# Altium PCB class-sensor.PcbDoc (part 1 of 2)
Units mm, origin at the board's own origin, x right, y up, seen from the top; angles counter-clockwise.
Board outline 152.4 x 135.3 mm, 2 copper layers (Top Layer, Bottom Layer); 48 components, 76 nets, 317 pads, 56 vias.
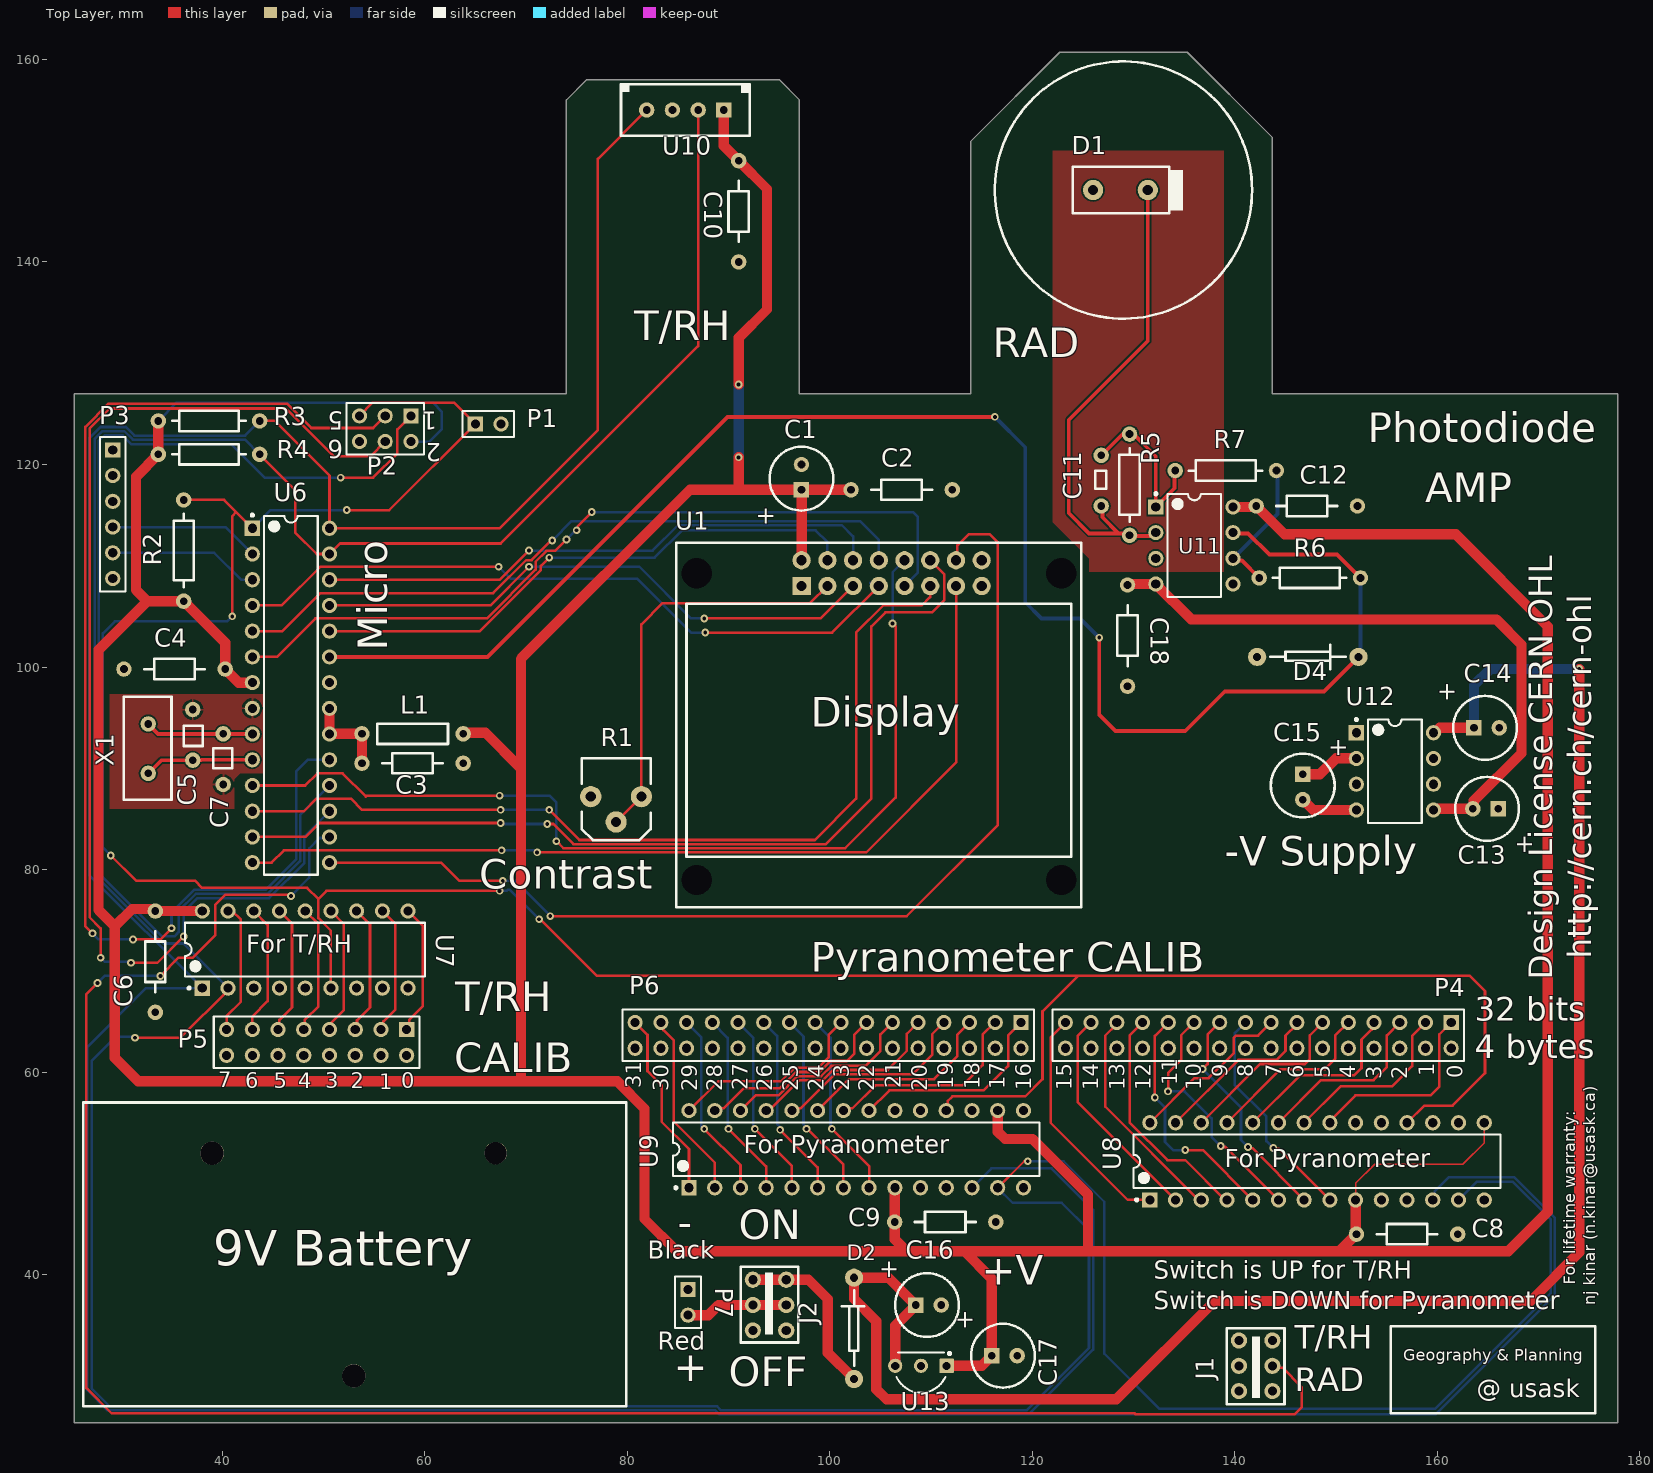
[diagram p0: Top Layer view]
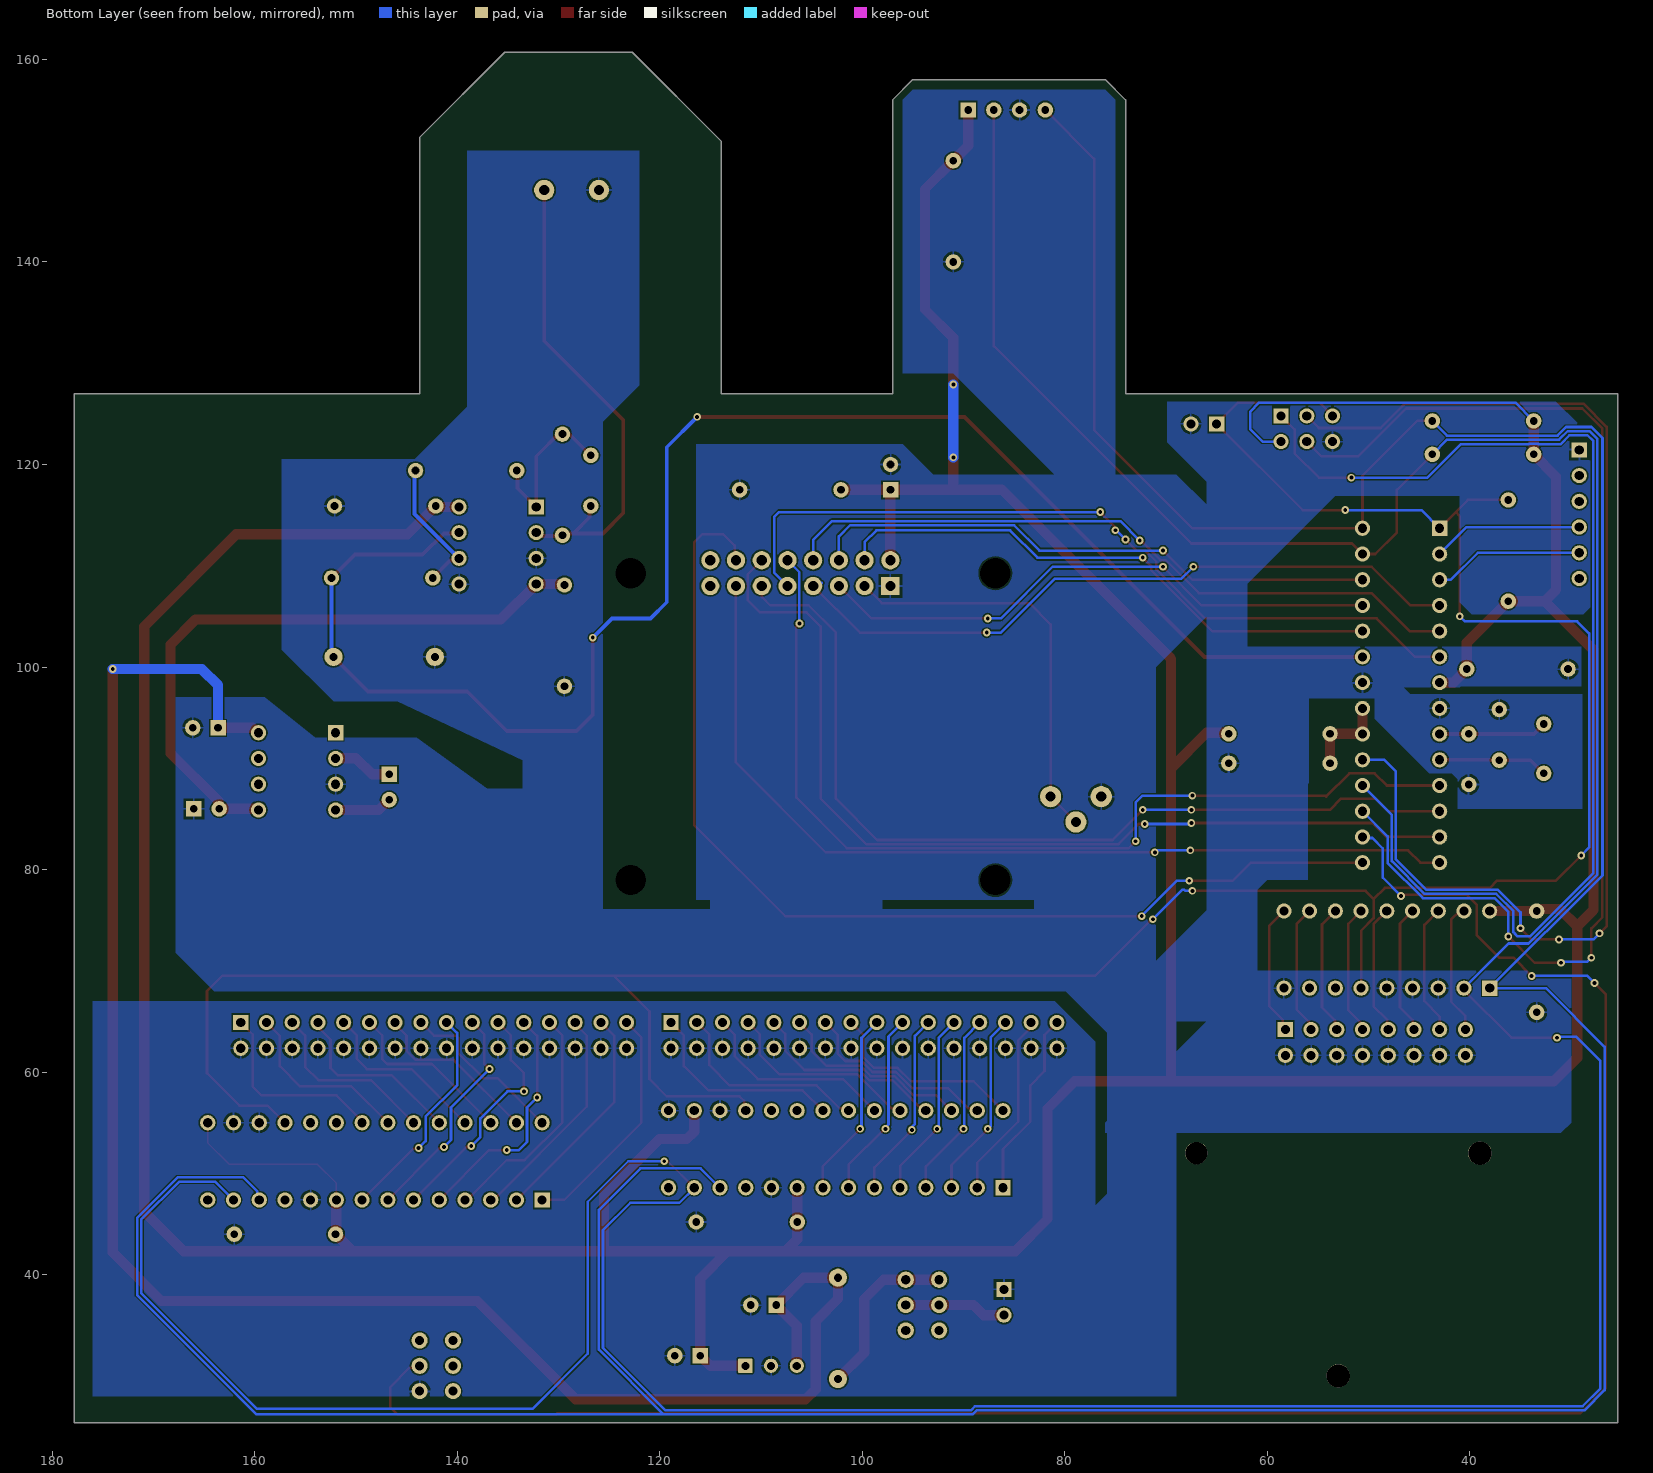
[diagram p1: Bottom Layer view, seen from below]

## Layer stack, top to bottom
Top Solder: solder mask 0.0102, Solder Resist, Dk 3.5
Top Layer: signal copper 0.0356
Dielectric 1: dielectric 0.32, FR-4, Dk 4.8
Bottom Layer: signal copper 0.0356
Bottom Solder: solder mask 0.0102, Solder Resist, Dk 3.5

## Board outline
135.3,160.7 143.7,152.3 143.7,127 177.8,127 177.8,25.4 25.4,25.4 25.4,127 74,127 74,155 74,156 76,158 95,158 97,156 97,127 113.9,127 113.9,151.9 122.7,160.7

## Design rules (kind name [scope] priority, off if disabled: settings)
Clearance "Clearance~Sunstone Circuits" [All] p1: gap=0.152 ignorepadtopadclearanceinfootprint=FALSE except(0: Arc-Hole Track-Hole SMDPad-Hole THPad-Hole Via-Hole Fill-Hole Poly-Hole Region-Hole Text-Hole) // Sunstone Circuits Minimum Clearance Rule (MLB~4&6 Layer Designs)
DiffPairsRouting DiffPairsRouting_1 [(InDifferentialPairClass('All Differential Pairs'))] p1: maxlimit=0.152 minlimit=0.152 mostfreqgap=0.152 toplayer_minwidth=0.381 toplayer_maxwidth=0.381 toplayer_prefwidth=0.381 bottomlayer_minwidth=0.381 bottomlayer_maxwidth=0.381 bottomlayer_prefwidth=0.381 maxuncoupledlength=12.7
DiffPairsRouting [All] p2 off: maxlimit=0.254 minlimit=0.254 mostfreqgap=0.254 toplayer_minwidth=0.381 toplayer_maxwidth=0.381 toplayer_prefwidth=0.381 bottomlayer_minwidth=0.381 bottomlayer_maxwidth=0.381 bottomlayer_prefwidth=0.381 maxuncoupledlength=12.7
HoleSize "HoleSize~Sunstone Circuits" [All] p1: absolutevalues=TRUE maxlimit=6.375 minlimit=0.203 maxpercent=80.000 minpercent=20.000 // Sunstone Circuits Hole Size Rule (MLB~4&6 Layer Designs)
HoleSize Testpoint [All] p2: absolutevalues=TRUE maxlimit=2.54 minlimit=0.025 maxpercent=80.000 minpercent=20.000
HoleSize TestPointUsage [All] p3: absolutevalues=TRUE maxlimit=2.54 minlimit=0.025 maxpercent=80.000 minpercent=20.000
MinimumAnnularRing "MinimumAnnularRing~Sunstone Circuits" [All] p1: minimumring=0.178 // Sunstone Circuits Minimum Annular Ring (MLB~4&6 Layer Designs)
MinimumSolderMaskSliver [All] p1: minsoldermaskwidth=0.127
PlaneClearance "PlaneClearance~Sunstone Circuits" [All] p1: clearance=0.305 // Sunstone Circuits Power Plane Clearance Rule (MLB~4&6 Layer Designs)
PlaneConnect "PlaneConnect~Sunstone Circuits" [All] p1: planeconnectstyle=Relief reliefexpansion=0.254 reliefentries=4 reliefconductorwidth=0.203 reliefairgap=0.254 // Sunstone Circuits Power Plane Connect Rule (MLB~4&6 Layer Designs)
PolygonConnect "PolygonConnect~Sunstone Circuits" [All] p1: connectstyle=Relief reliefconductorwidth=0.203 reliefentries=4 polygonreliefangle="90 Angle" airgapwidth=0.254 // Sunstone Circuits Polygon Connect Style (MLB~4&6 Layer Designs)
RoutingVias "RoutingVias~Sunstone Circuits" [All] p1: holewidth=0.381 width=0.762 viastyle="Through Hole" minholewidth=0.203 minwidth=0.61 maxholewidth=0.508 maxwidth=1.016 // Sunstone Circuits Routing Vias Rule (MLB~4&6 Layer Designs)
ShortCircuit "ShortCircuit~Sunstone Circuits" [All] p1: allowed=FALSE // Sunstone Circuits Short Circuit Rule~Do Not Allow (MLB~4&6 Layer Designs)
SilkToSilkClearance [All] p1: silktosilkclearance=0
SilkToSolderMaskClearance [IsPad] p1: minsilkscreentomaskgap=0 clearancetoexposedcopper=TRUE
SolderMaskExpansion "SolderMaskExpansion~Sunstone Circuits" [All] p1: expansion=0.076 istentingtop=FALSE // Sunstone Circuits Solder Mask Expansion Rule (MLB~4&6 Layer Designs)
ViasUnderSMD "ViasUnderSMD~Sunstone Circuits" [All] p1: allowed=FALSE // Sunstone Circuits Vias Under SMD~Do Not Allow (MLB~4&6 Layer Designs)
Width "Width~Sunstone Circuits" [All] p1: maxlimit=2.54 minlimit=0.152 preferedwidth=0.254 // Sunstone Circuits Minimum Width Rule (MLB~4&6 Layer Designs)
22 further rules are at their usual default settings.

## Components (designator, comment, footprint, x,y, rotation, side; value= is the part's Value field where it differs from the comment)
C1 "Cap Pol1" ECE-A1HKS100 97.2,117.5 r180 top value=10uF
C2 "Cap Semi" A104K15X7RF5TAA 112.1,117.5 r180 top value=0.1uF
C3 "Cap Semi" A104K15X7RF5TAA 63.8,90.5 r180 top value=0.1uF
C4 "Cap Semi" A104K15X7RF5TAA 30.3,99.8 r0 top value=0.1uF
C5 "Cap Semi" K330J15C0GF5TH5 37.1,95.8 r270 top value=33pF
C6 "Cap Semi" A104K15X7RF5TAA 33.4,65.9 r90 top value=0.1uF
C7 "Cap Semi" K330J15C0GF5TH5 40.1,88.4 r90 top value=33pF
C8 "Cap Semi" A104K15X7RF5TAA 162,44 r180 top value=0.1uF
C9 "Cap Semi" A104K15X7RF5TAA 116.4,45.2 r180 top value=0.1uF
C10 "Cap Semi" A104K15X7RF5TAA 91,140 r90 top value=0.1uF
C11 "Cap Semi" FA28C0G1H010CNU06 126.8,115.9 r90 top value=1pF
C12 "Cap Semi" A104K15X7RF5TAA 152.1,115.9 r180 top value=0.1uF
C13 "Cap Pol1" ECE-A1HKS100 166,86 r270 top value=10uF
C14 "Cap Pol1" ECE-A1HKS100 163.6,94 r90 top value=10uF
C15 "Cap Pol1" ECE-A1HKS100 146.7,89.4 r0 top value=10uF
C16 "Cap Pol1" ECE-A1HKS100 108.5,37 r90 top value=10uF
C17 "Cap Pol1" ECE-A1HKS100 116,32 r90 top value=10uF
C18 "Cap Semi" A104K15X7RF5TAA 129.4,98.1 r90 top value=0.1uF
D1 "BPW34" BPW34 126,147.1 r0 top
D2 "D Schottky" BAT85S-TAP 102.3,34.7 r90 top
D4 "D Schottky" BAT85S-TAP 147.2,101.1 r0 top
J1 "SWITCH SLIDE DPDT 300MA 6V" JS202011CQN 142.1,31 r270 top
J2 "SWITCH SLIDE DPDT 300MA 6V" JS202011CQN 94,37 r90 top
L1 "Inductor" 78F100J-TR-RC 63.8,93.4 r180 top value=10uH
P1 "Header 2" HDR1X2 65,124 r0 top
P2 "Header 3X2" HDR2X3 58.64,124.8 r180 top
P3 "Header 6" HDR1X6 29.2,121.44 r270 top
P4 "Header 16X2" HDR2X16 161.36,64.9 r180 top
P5 "Header 8X2" HDR2X8 58.22,64.2 r180 top
P6 "Header 16X2" HDR2X16 118.88,64.9 r180 top
P7 "Header 2" HDR1X2 86,38.54 r270 top
R1 "3306P-1-502" 3306P-1-502 78.9,84.7 r180 top
R2 "Res3" CF14JT10K0 36.2,116.5 r270 top value=10k
R3 "Res3" CF14JT10K0 43.7,124.3 r180 top value=10k
R4 "Res3" CF14JT10K0 43.7,121 r180 top value=10k
R5 "Res3" MFP-25BRD52-910R 129.6,117.9 r90 top value=910
R6 "Res3" RNF14FTD1K00 147.3,108.8 r0 top value=1k
R7 "Res3" RNF14FTD1K00 139,119.4 r0 top value=1k
U1 "ERM802-1 LCD Module 8x2" ERM802-1 86.85,109.265 r0 top
U6 "ATmega168A-PU" 28P3 46.79,97.19 r0 top
U7 "MCP23008-E/P" PDIP300-P18 48.2,72.1 r90 top
U8 "MCP23017-E/SP" SPDIP300-SP28 148.11,51.19 r90 top
U9 "MCP23017-E/SP" SPDIP300-SP28 102.61,52.39 r90 top
U10 "AM2320" AM2320 89.54,155 r180 top
U11 "TL072IP" P0008A 136,112 r0 top
U12 "LMC7660IN/NOPB" P0008A 155.8,89.7 r0 top
U13 "LP2950-50LPRE3" LP0003A 109,31 r270 top
X1 "ATS080B-E" ATS080B-E 32.7,94.38 r270 top

## Footprints (in the part's own frame and the unit in brackets; to place one, negate y for a bottom-side part, rotate by r counter-clockwise, add the part's x,y. Pads: shape width x height; smd on the part's side, far side on the other; paste and mask are expansions set on the pad)
28P3 [mm] "28-Pin Plastic Dual In-Line Package (PDIP)"
  rect 1.5x1.5 hole 0.9: 1(-3.81,16.51)
  round 1.5 hole 0.9: 2(-3.81,13.97) 3(-3.81,11.43) 4(-3.81,8.89) 5(-3.81,6.35) 6(-3.81,3.81) 7(-3.81,1.27) 8(-3.81,-1.27) 9(-3.81,-3.81) 10(-3.81,-6.35) 11(-3.81,-8.89) 12(-3.81,-11.43) 13(-3.81,-13.97) 14(-3.81,-16.51) 15(3.81,-16.51) 16(3.81,-13.97) 17(3.81,-11.43) 18(3.81,-8.89) 19(3.81,-6.35) 20(3.81,-3.81) 21(3.81,-1.27) 22(3.81,1.27) 23(3.81,3.81) 24(3.81,6.35) 25(3.81,8.89) 26(3.81,11.43) 27(3.81,13.97) 28(3.81,16.51)
  silkscreen extent -3.93,-17.7 2.65,17.93, body extent -3.6,-17.65 3.6,17.65, height 4.58
78F100J-TR-RC [mil] "FIXED IND 10UH 370MA 750 MOHM TH"
  round 60 hole 30: 1(0,0) 2(393.7,0)
  silkscreen extent 59,-39 335,39
3306P-1-502 [mm] "TRIMMER 5K OHM 0.2W PC PIN TOP"
  round 2.1 hole 1: 1(-2.5,-2.5) 2(0,0) 3(2.5,-2.5)
  silkscreen extent -3.4,-6.3 3.4,1.8, body extent -3.4,-6.33 3.4,1.8, height 7.71
A104K15X7RF5TAA [mil] "CAP CER 0.1UF 50V X7R AXIAL"
  round 60 hole 30: 1(0,0) 2(393.7,0)
  silkscreen extent 79,-39 315,39
AM2320 [mil] "AM2320 DIGITAL TEMPERATURE AND RH"
  rect 60x60 hole 30: 1(0,0)
  round 60 hole 30: 2(100,0) 3(200,0) 4(300,0)
  silkscreen extent -102,-102 402,100
ATS080B-E [mil] "CRYSTAL 8.0000MHZ 18PF T/H"
  round 60 hole 30: 1(0,0) 2(192.13,0)
  silkscreen extent -106,-94 295,91
BAT85S-TAP [mm] "DIODE SCHOTTKY 30V 200MA DO35"
  round 1.8 hole 0.8: 1(-5,-0.1) 2(5,-0.1)
  silkscreen extent -3.7,-0.5 3.75,0.4
BPW34 [mm] "BPW34"
  round 2 hole 1: 1(0,0) 2(5.4,0)
  silkscreen extent -2,-2.3 8.9,2.3
CF14JT10K0 [mil] "RES 10K OHM 1/4W 5% AXIAL"
  round 60 hole 30: 1(0,0) 2(393.7,0)
  silkscreen extent 53,-39 339,39
ECE-A1HKS100 [mil] "CAP ALUM 10UF 20% 50V RADIAL"
  rect 60x60 hole 30: 1(0,0)
  round 60 hole 30: 2(0,-98.43)
  silkscreen extent -124,-167 124,81, body extent -126,-167 122,81, height 197
ERM802-1 [mm]
  rect 1.8x1.8 hole 1: 1(10.37,-1.265)
  round 1.8 hole 1: 2(10.37,1.275) 3(12.91,-1.265) 4(12.91,1.275) 5(15.45,-1.265) 6(15.45,1.275) 7(17.99,-1.265) 8(17.99,1.275) 9(20.53,-1.265) 10(20.53,1.275) 11(23.07,-1.265) 12(23.07,1.275) 13(25.61,-1.265) 14(25.61,1.275) 15(28.15,-1.265) 16(28.15,1.275)
  round 2.2 hole 3: H1(0,0) H2(36,0) H3(0,-30.3) H4(36,-30.3)
  silkscreen extent -2,-33 38,3
FA28C0G1H010CNU06 [mil] "CAP CER 1PF 50V C0G RADIAL"
  round 60 hole 30: 1(0,0) 2(196.85,0)
  silkscreen extent 67,-20 138,24
HDR1X2 [mm] "Connector; Header; 2 Position"
  rect 1.5x1.5 hole 0.9: 1(0,0)
  round 1.5 hole 0.9: 2(2.54,0)
  silkscreen extent -1.27,-1.27 3.81,1.27
HDR1X6 [mm] "Connector; Header; 6 Position"
  rect 1.5x1.5 hole 0.9: 1(0,0)
  round 1.5 hole 0.9: 2(2.54,0) 3(5.08,0) 4(7.62,0) 5(10.16,0) 6(12.7,0)
  silkscreen extent -1.27,-1.27 13.97,1.27
HDR2X3 [mm] "Connector; Header; 3x2 Position"
  rect 1.5x1.5 hole 0.9: 1(0,0)
  round 1.5 hole 0.9: 2(0,2.54) 3(2.54,0) 4(2.54,2.54) 5(5.08,0) 6(5.08,2.54)
  silkscreen extent -1.27,-1.27 6.35,3.81
HDR2X8 [mm] "Connector; Header; 8x2 Position"
  rect 1.5x1.5 hole 0.9: 1(0,0)
  round 1.5 hole 0.9: 2(0,2.54) 3(2.54,0) 4(2.54,2.54) 5(5.08,0) 6(5.08,2.54) 7(7.62,0) 8(7.62,2.54) 9(10.16,0) 10(10.16,2.54) 11(12.7,0) 12(12.7,2.54) 13(15.24,0) 14(15.24,2.54) 15(17.78,0) 16(17.78,2.54)
  silkscreen extent -1.27,-1.27 19.05,3.81
HDR2X16 [mm] "Connector; Header; 16x2 Position"
  rect 1.5x1.5 hole 0.9: 1(0,0)
  round 1.5 hole 0.9: 2(0,2.54) 3(2.54,0) 4(2.54,2.54) 5(5.08,0) 6(5.08,2.54) 7(7.62,0) 8(7.62,2.54) 9(10.16,0) 10(10.16,2.54) 11(12.7,0) 12(12.7,2.54) 13(15.24,0) 14(15.24,2.54) 15(17.78,0) 16(17.78,2.54) 17(20.32,0) 18(20.32,2.54) 19(22.86,0) 20(22.86,2.54) 21(25.4,0) 22(25.4,2.54) 23(27.94,0) 24(27.94,2.54) 25(30.48,0) 26(30.48,2.54) 27(33.02,0) 28(33.02,2.54) 29(35.56,0) 30(35.56,2.54) 31(38.1,0) 32(38.1,2.54)
  silkscreen extent -1.27,-1.27 39.37,3.81
JS202011CQN [mm] "SWITCH SLIDE DPDT 300MA 6V"
  round 1.6 hole 0.9: 1(-2.5,-1.7) 2(0,-1.7) 3(2.5,-1.7) 4(-2.5,1.6) 5(0,1.6) 6(2.5,1.6)
  silkscreen extent -3.7,-2.9 3.8,2.8
K330J15C0GF5TH5 [mil] "CAP CER 33PF 50V C0G/NP0 RADIAL"
  round 60 hole 30: 1(0,0) 2(196.85,0)
  silkscreen extent 63,-35 142,39
LP0003A [mm] "TO, Flat Index; 3 In-Line, Formed Axial Leads; Body Dia. 4.8mm; Leads 0.56 x 0.41 mm (max)"
  rrect7% 1.4x1.4 hole 0.8: 1(0,2.54)
  round 1.4 hole 0.8: 2(0,0) 3(0,-2.54)
  silkscreen extent -1.35,-2.41 2.65,2.95, body extent -1.33,-2.83 2.35,2.83, height 9.01
MFP-25BRD52-910R [mil] "RES 910 OHM 1/4W 0.1% AXIAL"
  round 60 hole 30: 1(-192.91,0) 2(200.79,0)
  silkscreen extent -140,-39 146,39
P0008A [mm] "DIP, 8-Leads, Body 10.15x6.6mm, Pitch 2.54mm"
  rect 1.5x1.5 hole 0.9: 1(-3.81,3.81)
  round 1.5 hole 0.9: 2(-3.81,1.27) 3(-3.81,-1.27) 4(-3.81,-3.81) 5(3.81,-3.81) 6(3.81,-1.27) 7(3.81,1.27) 8(3.81,3.81)
  silkscreen extent -3.93,-5.1 2.65,5.23, body extent -3.95,-5.07 3.95,5.07, height 5.08
PDIP300-P18 [mm] "DIP, 18-Pin, Row Spacing 7.62 mm, Pitch 2.54 mm"
  rect 1.5x1.5 hole 0.9: 1(-3.81,10.16)
  round 1.5 hole 0.9: 2(-3.81,7.62) 3(-3.81,5.08) 4(-3.81,2.54) 5(-3.81,0) 6(-3.81,-2.54) 7(-3.81,-5.08) 8(-3.81,-7.62) 9(-3.81,-10.16) 10(3.81,-10.16) 11(3.81,-7.62) 12(3.81,-5.08) 13(3.81,-2.54) 14(3.81,0) 15(3.81,2.54) 16(3.81,5.08) 17(3.81,7.62) 18(3.81,10.16)
  silkscreen extent -3.93,-11.85 2.65,11.85, body extent -3.6,-11.8 3.6,11.8, height 5.33
RNF14FTD1K00 [mil] "RES 1K OHM 1/4W 1% AXIAL"
  round 60 hole 30: 1(-192.91,0) 2(200.79,0)
  silkscreen extent -140,-39 146,39
SPDIP300-SP28 [mm] "DIP, 28-Pin, Row Spacing 7.62 mm, Pitch 2.54 mm"
  rect 1.5x1.5 hole 0.9: 1(-3.81,16.51)
  round 1.5 hole 0.9: 2(-3.81,13.97) 3(-3.81,11.43) 4(-3.81,8.89) 5(-3.81,6.35) 6(-3.81,3.81) 7(-3.81,1.27) 8(-3.81,-1.27) 9(-3.81,-3.81) 10(-3.81,-6.35) 11(-3.81,-8.89) 12(-3.81,-11.43) 13(-3.81,-13.97) 14(-3.81,-16.51) 15(3.81,-16.51) 16(3.81,-13.97) 17(3.81,-11.43) 18(3.81,-8.89) 19(3.81,-6.35) 20(3.81,-3.81) 21(3.81,-1.27) 22(3.81,1.27) 23(3.81,3.81) 24(3.81,6.35) 25(3.81,8.89) 26(3.81,11.43) 27(3.81,13.97) 28(3.81,16.51)
  silkscreen extent -3.93,-18.1 2.65,18.1, body extent -3.55,-18.1 3.55,18.1, height 5.33

## Part data
C1 C13 C14 C15 C16 C17: "Polarized Capacitor (Radial)", Capacitance=10uF, Case/Package=Radial, Leakage Current=3A, Manufacturer=Panasonic, Manufacturer Part Number=ECE-A1HKS100, Max Operating Temperature=85°C, Min Operating Temperature=-40°C, Package Quantity=200, Ripple Current=35mA, Supplier Part Number 1=P997-ND, Tolerance=20%, Voltage=50V, ComponentLink1Description=https://datasheet.ciiva.com/11778/0900766b800274c4-11778985.pdf?src-supplier=RSComponents, ComponentLink1URL=https://datasheet.ciiva.com/11778/0900766b800274c4-11778985.pdf?src-supplier=RSComponents, ComponentLink2Description=https://datasheet.ciiva.com/17536/aba0000ce15-17536597.pdf?src-supplier=Avnet+Europe, ComponentLink2URL=https://datasheet.ciiva.com/17536/aba0000ce15-17536597.pdf?src-supplier=Avnet+Europe, ComponentLink3Description=https://datasheet.ciiva.com/14594/70067878-14594328.pdf?src-supplier=Allied+Electronics, ComponentLink3URL=https://datasheet.ciiva.com/14594/70067878-14594328.pdf?src-supplier=Allied+Electronics, ComponentLink4Description=https://datasheet.ciiva.com/16205/aba0000ce15-16205737.pdf?src-supplier=Future+Electronics, ComponentLink4URL=https://datasheet.ciiva.com/16205/aba0000ce15-16205737.pdf?src-supplier=Future+Electronics, ComponentLink5Description=https://datasheet.ciiva.com/24025/a-e-461514-24025641.pdf?src-supplier=Mouser, ComponentLink5URL=https://datasheet.ciiva.com/24025/a-e-461514-24025641.pdf?src-supplier=Mouser, ComponentLink6Description=https://datasheet.ciiva.com/43459/1339471-43459545.pdf?src-supplier=Farnell, ComponentLink6URL=https://datasheet.ciiva.com/43459/1339471-43459545.pdf?src-supplier=Farnell, ComponentLink7Description=https://datasheet.ciiva.com/15166/getdatasheetpartid-169217-15166123.pdf?src-supplier=Verical, ComponentLink7URL=https://datasheet.ciiva.com/15166/getdatasheetpartid-169217-15166123.pdf?src-supplier=Verical, ComponentLink8Description=https://datasheet.ciiva.com/46397/1339471-46397117.pdf?src-supplier=Element14, ComponentLink8URL=https://datasheet.ciiva.com/46397/1339471-46397117.pdf?src-supplier=Element14, ComponentLink9Description=https://datasheet.ciiva.com/2983/aba0000ce15-2983886.pdf?src-supplier=Avnet, ComponentLink9URL=https://datasheet.ciiva.com/2983/aba0000ce15-2983886.pdf?src-supplier=Avnet, Diameter=6.3mm, Height=5mm, Height - Seated (Max)=0.197inch, LatestRevisionDate=17-Jul-2002, LatestRevisionNote="Re-released for DXP Platform.", Lead Diameter=0.45mm, Lead Free="Lead Free", Lead Pitch=2.5mm, Length=5mm, Life (Hours)=1000Hour, Mount="Through Hole,PCB", Number of Pins=2, PackageDescription="Polarized Capacitor (Radial); 2 Leads", PackageReference=RB7.6-15, Packaging=Bulk, Polarity=Polar, Pricing 1="1=0.10000, 10=0.03000 (USD)", Published=8-Jun-2000, Publisher="Altium Limited", Radiation Hardening=No, REACH SVHC="No SVHC", Ripple Current (AC)=35mA, RoHS=Yes, Stock 1=132836, Supplier 1=Digi-Key, Termination=Radial, Voltage Rating=50V, Voltage Rating (DC)=50V, Weight=0.01lb, Width=0.5inch
C2 C3 C4 C6 C8 C9 C10 C12 C18: "Capacitor (Semiconductor SIM Model)", Capacitance=100nF, Case/Package=Dipped, Dielectric=X7R, Manufacturer="Vishay BCcomponents", Manufacturer Part Number=A104K15X7RF5TAA, Max Operating Temperature=125°C, Min Operating Temperature=-55°C, Package Quantity=1, Supplier Part Number 1=1109PHCT-ND, Tolerance=10%, Voltage=50V, ComponentLink1Description=https://datasheet.ciiva.com/145/aseries-145936.pdf?src-supplier=Digi-Key, ComponentLink1URL=https://datasheet.ciiva.com/145/aseries-145936.pdf?src-supplier=Digi-Key, ComponentLink2Description=https://datasheet.ciiva.com/5815/1734588-5815375.pdf?src-supplier=Farnell, ComponentLink2URL=https://datasheet.ciiva.com/5815/1734588-5815375.pdf?src-supplier=Farnell, ComponentLink3Description=https://datasheet.ciiva.com/18442/70122957-18442089.pdf?src-supplier=Allied+Electronics, ComponentLink3URL=https://datasheet.ciiva.com/18442/70122957-18442089.pdf?src-supplier=Allied+Electronics, ComponentLink4Description=https://datasheet.ciiva.com/2988/aseries-2988250.pdf?src-supplier=Avnet, ComponentLink4URL=https://datasheet.ciiva.com/2988/aseries-2988250.pdf?src-supplier=Avnet, ComponentLink5Description=https://datasheet.ciiva.com/17444/aseries-17444908.pdf?src-supplier=Avnet+Europe, ComponentLink5URL=https://datasheet.ciiva.com/17444/aseries-17444908.pdf?src-supplier=Avnet+Europe, ComponentLink6Description=https://datasheet.ciiva.com/46418/1796772-46418252.pdf?src-supplier=Element14, ComponentLink6URL=https://datasheet.ciiva.com/46418/1796772-46418252.pdf?src-supplier=Element14, ComponentLink7Description=https://datasheet.ciiva.com/145/aseries-145935.pdf?src-supplier=Digi-Key, ComponentLink7URL=https://datasheet.ciiva.com/145/aseries-145935.pdf?src-supplier=Digi-Key, Contact Plating=Tin, Diameter=2.5mm, LatestRevisionDate=29-May-2009, LatestRevisionNote="IPC-7351 Footprint Added.", Lead Diameter=0.5mm, Lead Free="Lead Free", Lead Length=24.3mm, Length=3.8mm, Mount="Through Hole,PCB,Axial", PackageDescription="Chip Capacitor", PackageReference=C1206, Packaging="Tape and Reel", Pricing 1="1=0.24000, 10=0.16500, 100=0.09350, 500=0.06598, 1000=0.05773, 2500=0.05498 (USD)", Published=8-Jun-2000, Publisher="Altium Limited", Radiation Hardening=No, REACH SVHC=Unknown, RoHS=Yes, Stock 1=502711, Supplier 1=Digi-Key, Termination=Axial, Voltage Rating=50V, Voltage Rating (DC)=50V
C5 C7: "Capacitor (Semiconductor SIM Model)", Capacitance=33pF, Case/Package=Dipped, Dielectric=C0G, Dielectric Material=Ceramic, Manufacturer="Vishay BCcomponents", Manufacturer Part Number=K330J15C0GF5TH5, Max Operating Temperature=125°C, Min Operating Temperature=-55°C, Package Quantity=1, Supplier Part Number 1=BC1036CT-ND, Tolerance=5%, Voltage Rating=50V, ComponentLink1Description=https://datasheet.ciiva.com/145/kseries-145772.pdf?src-supplier=Digi-Key, ComponentLink1URL=https://datasheet.ciiva.com/145/kseries-145772.pdf?src-supplier=Digi-Key, ComponentLink2Description=https://datasheet.ciiva.com/145/kseries-145773.pdf?src-supplier=Digi-Key, ComponentLink2URL=https://datasheet.ciiva.com/145/kseries-145773.pdf?src-supplier=Digi-Key, Depth=2.5mm, Height - Seated (Max)=0.257inch, LatestRevisionDate=29-May-2009, LatestRevisionNote="IPC-7351 Footprint Added.", Lead/Base Style="Formed Leads", Lead Free="Contains Lead", Lead Length=30mm, Lead Pitch=5mm, Length=0.157inch, Mount="Through Hole", Number of Pins=2, PackageDescription="Chip Capacitor", PackageReference=C1206, Packaging="Tape and Reel", Pricing 1="1=0.26000, 10=0.17400, 100=0.08830, 500=0.06040, 1000=0.05343 (USD)", Published=8-Jun-2000, Publisher="Altium Limited", Radiation Hardening=No, REACH SVHC=Unknown, RoHS=Yes, Stock 1=19591, Supplier 1=Digi-Key, Termination=Radial, Voltage Rating (DC)=50V, Width=0.098inch
C11: "Capacitor (Semiconductor SIM Model)", Capacitance=1pF, Case/Package=Radial, Manufacturer=TDK, Manufacturer Part Number=FA28C0G1H010CNU06, Max Operating Temperature=125°C, Min Operating Temperature=-55°C, Ratings=AEC-Q200, Supplier Part Number 1=445-180705-1-ND, Voltage Rating=50V, ComponentLink1Description=https://product.tdk.com/info/en/catalog/datasheets/leadmlcc_halogenfree_fa_en.pdf?src-supplier=Digi-Key, ComponentLink1URL=https://product.tdk.com/info/en/catalog/datasheets/leadmlcc_halogenfree_fa_en.pdf?src-supplier=Digi-Key, Height - Seated (Max)=0.217inch, LatestRevisionDate=29-May-2009, LatestRevisionNote="IPC-7351 Footprint Added.", Lead/Base Style=Kinked, Lead Pitch=0.197inch, Length=0.157inch, Mount="Through Hole", PackageDescription="Chip Capacitor", PackageReference=C1206, Packaging="Tape and Reel", Pricing 1="1=0.32000, 10=0.22100, 100=0.12520, 500=0.08840, 1000=0.07735 (USD)", Published=8-Jun-2000, Publisher="Altium Limited", Stock 1=7819, Supplier 1=Digi-Key, Width=0.098inch
D1: Dark Current=30nA, Forward Voltage=1.3V, Manufacturer="Osram Opto", Max Operating Temperature=100°C, Min Operating Temperature=-40°C, Power Dissipation=150mW, Reverse Breakdown Voltage=32V, Supplier Part Number 1=475-1070-ND, ComponentLink1Description=https://datasheet.ciiva.com/19453/1621132-19453495.pdf?src-supplier=Jameco, ComponentLink1URL=https://datasheet.ciiva.com/19453/1621132-19453495.pdf?src-supplier=Jameco, ComponentLink2Description=https://datasheet.ciiva.com/11772/0900766b80a15a67-11772491.pdf?src-supplier=RSComponents, ComponentLink2URL=https://datasheet.ciiva.com/11772/0900766b80a15a67-11772491.pdf?src-supplier=RSComponents, ComponentLink3Description=https://datasheet.ciiva.com/26883/getdatasheetpartid-571168-26883163.pdf?src-supplier=Verical, ComponentLink3URL=https://datasheet.ciiva.com/26883/getdatasheetpartid-571168-26883163.pdf?src-supplier=Verical, ComponentLink4Description=https://datasheet.ciiva.com/29138/153005-da-01-ml-pin-photodiode-bpw34-osr-de-en-29138768.pdf?src-supplier=Conrad, ComponentLink4URL=https://datasheet.ciiva.com/29138/153005-da-01-ml-pin-photodiode-bpw34-osr-de-en-29138768.pdf?src-supplier=Conrad, Fall Time=20ns, Manufacturer Part Number=BPW34, Mount="Through Hole", Number of Pins=2, Packaging=Bulk, Polarity=Reverse, Pricing 1="1=1.05000, 10=0.81700, 100=0.52550, 500=0.44374, 1000=0.35033, 2500=0.32697, 5000=0.31529, 10000=0.31062, 25000=0.30362 (USD)", Radiation Hardening=No, Rise Time=20ns, RoHS=Yes, Stock 1=40998, Supplier 1=Digi-Key, Wavelength=850nm
D2 D4: "Schottky Diode", Average Rectified Current=200mA, Forward Voltage=800mV, Manufacturer=Vishay, Manufacturer Part Number=BAT85S-TAP, Max Forward Surge Current (Ifsm)=5A, Max Operating Temperature=125°C, Max Repetitive Reverse Voltage (Vrrm)=30V, Max Reverse Leakage Current=2uA, Min Operating Temperature=-65°C, Package Quantity=10000, Supplier Part Number 1=BAT85S-TAPCT-ND, Code_JEDEC=DO-214-AA, ComponentLink1Description=https://datasheet.ciiva.com/23785/1749004-23785297.pdf?src-supplier=Newark, ComponentLink1URL=https://datasheet.ciiva.com/23785/1749004-23785297.pdf?src-supplier=Newark, ComponentLink2Description=https://datasheet.ciiva.com/17078/bat85s-tap-17078427.pdf?src-supplier=Allied+Electronics, ComponentLink2URL=https://datasheet.ciiva.com/17078/bat85s-tap-17078427.pdf?src-supplier=Allied+Electronics, ComponentLink3Description=https://datasheet.ciiva.com/15144/getdatasheetpartid-50689-15144221.pdf?src-supplier=Verical, ComponentLink3URL=https://datasheet.ciiva.com/15144/getdatasheetpartid-50689-15144221.pdf?src-supplier=Verical, ComponentLink4Description=https://datasheet.ciiva.com/16418/bat85s-16418454.pdf?src-supplier=Future+Electronics, ComponentLink4URL=https://datasheet.ciiva.com/16418/bat85s-16418454.pdf?src-supplier=Future+Electronics, ComponentLink5Description=https://datasheet.ciiva.com/25931/bat85s-25931304.pdf?src-supplier=Avnet+Europe, ComponentLink5URL=https://datasheet.ciiva.com/25931/bat85s-25931304.pdf?src-supplier=Avnet+Europe, ComponentLink6Description=https://datasheet.ciiva.com/13950/bat85s-13950093.pdf?src-supplier=Digi-Key, ComponentLink6URL=https://datasheet.ciiva.com/13950/bat85s-13950093.pdf?src-supplier=Digi-Key, ComponentLink7Description=https://datasheet.ciiva.com/13950/bat85s-13950090.pdf?src-supplier=Digi-Key, ComponentLink7URL=https://datasheet.ciiva.com/13950/bat85s-13950090.pdf?src-supplier=Digi-Key, ComponentLink8Description=https://datasheet.ciiva.com/8283/bat85s-8283915.pdf?src-supplier=Avnet, ComponentLink8URL=https://datasheet.ciiva.com/8283/bat85s-8283915.pdf?src-supplier=Avnet, Contact Plating=Tin,Silver, Element Configuration=Single, Forward Current=200mA, Height=1.7mm, LatestRevisionDate=17-Jul-2002, LatestRevisionNote="Re-released for DXP Platform.", Lead Free="Lead Free", Length=3.9mm, Max Reverse Voltage (DC)=30V, Max Surge Current=5A, Mount="Through Hole", Number of Pins=2, PackageDescription="DO-214-AA/SMB; 2 C-Bend Leads; Body 5.3 x 3.6 mm, inc. leads (LxW)", PackageReference=SMB, Packaging="Ammo Pack", Peak Non-Repetitive Surge Current=5A, Peak Reverse Current=2uA, Pricing 1="1=0.38000, 10=0.31000, 100=0.16440, 500=0.10816, 1000=0.07354, 2500=0.06633, 5000=0.05768 (USD)", Published=8-Jun-2000, Publisher="Altium Limited", Radiation Hardening=No, Recovery Time=5ns, Reverse Recovery Time=5ns, RoHS=Yes, Stock 1=54447, Supplier 1=Digi-Key, Width=1.7mm
J1 J2: library part JS202011CQN, Contact Current Rating=100mA, Contact Resistance=70mR, Current Rating=300mA, Flammability Rating="UL94 V-0", Manufacturer="ITT C&K", Max Operating Temperature=85°C, Max Voltage Rating (DC)=6V, Min Operating Temperature=-40°C, Package Quantity=1, Supplier Part Number 1=401-2001-ND, Actuator Length=2mm, Actuator Material=Nylon,Polyamide, Actuator Type=Standard, ComponentLink1Description=https://datasheet.ciiva.com/5280/js-15sept15-5280375.pdf?src-supplier=Mouser, ComponentLink1URL=https://datasheet.ciiva.com/5280/js-15sept15-5280375.pdf?src-supplier=Mouser, ComponentLink2Description=https://datasheet.ciiva.com/22630/1707718-22630695.pdf?src-supplier=Element14, ComponentLink2URL=https://datasheet.ciiva.com/22630/1707718-22630695.pdf?src-supplier=Element14, ComponentLink3Description=https://datasheet.ciiva.com/8082/js-9dec14-8082522.pdf?src-supplier=Avnet, ComponentLink3URL=https://datasheet.ciiva.com/8082/js-9dec14-8082522.pdf?src-supplier=Avnet, ComponentLink4Description=https://datasheet.ciiva.com/2889/js-9dec14-2889166.pdf?src-supplier=Digi-Key, ComponentLink4URL=https://datasheet.ciiva.com/2889/js-9dec14-2889166.pdf?src-supplier=Digi-Key, Contact Material="Copper Alloy", Contact Plating=Silver, Depth=3.6mm, Electrical Life=5000Cycles, Housing Material=Nylon, Illumination Type=Non-Illuminated, Lead Free="Lead Free", Length=9mm, Manufacturer Part Number=JS202011CQN, Max Current Rating=300mA, Mount="Through Hole", Orientation=Vertical, Packaging=Bulk, Pricing 1="1=0.43000, 10=0.41600, 25=0.40720, 50=0.36380, 100=0.34650, 250=0.33784, 500=0.28586, 1000=0.27720, 5000=0.24255 (USD)", Radiation Hardening=No, REACH SVHC="No SVHC", RoHS=Yes, Stock 1=30365, Supplier 1=Digi-Key, Switch Function=On-On, Switch Travel=2mm, Termination="PC Pins", Throw Configuration=DPDT, Voltage Rating (DC)=6V
L1: Case/Package=Axial, Current Rating=370mA, DC Resistance (DCR)=750mR, Inductance=10uH, Manufacturer=Bourns, Manufacturer Part Number=78F100J-TR-RC, Max Operating Temperature=105°C, Min Operating Temperature=-55°C, Package Quantity=5000, Self Resonant Frequency=18MHz, Supplier Part Number 1=78F100J-TR-RCCT-ND, Test Frequency=7.9MHz, Tolerance=5%, Code_IEC=1005, Code_JEITA=0402, ComponentLink1Description=https://datasheet.ciiva.com/15161/getdatasheetpartid-486343-15161381.pdf?src-supplier=Verical, ComponentLink1URL=https://datasheet.ciiva.com/15161/getdatasheetpartid-486343-15161381.pdf?src-supplier=Verical, ComponentLink2Description=https://datasheet.ciiva.com/6703/78f-series-6703431.pdf?src-supplier=Digi-Key, ComponentLink2URL=https://datasheet.ciiva.com/6703/78f-series-6703431.pdf?src-supplier=Digi-Key, Composition=Wirewound, Contact Plating=Tin, Core Material=Ferrite, DC Current=370mA, Diameter=2.79mm, LatestRevisionDate=29-May-2009, LatestRevisionNote="IPC-7351 Footprint Added.", Lead/Base Style=Axial, Lead Diameter=0.51mm, Length=7.11mm, Max DC Current=370mA, Military Standard=Not, Mount="Through Hole", PackageDescription="Chip Inductor", PackageReference=0402-A, Packaging="Tape and Reel", Pricing 1="1=0.31000, 10=0.27600, 100=0.18980, 500=0.16216, 1000=0.12420, 2500=0.11730 (USD)", Published=8-Jun-2000, Publisher="Altium Limited", Q Factor=40, Radiation Hardening=No, RoHS=Yes, Shielding=Unshielded, Stock 1=122934, Supplier 1=Digi-Key, Termination=Axial
P1: "Header, 2-Pin", Color=White, Contact Resistance=10mR, Current Rating=4A, Flammability Rating="UL94 V-0", Insulation Resistance=500GR, Manufacturer=Molex, Manufacturer Part Number=22-23-2021, Max Operating Temperature=75°C, Min Operating Temperature=0°C, Package Quantity=3000, Supplier Part Number 1=WM4200-ND, Voltage Rating=250V, Approvals=UL,CSA, ComponentLink1Description=https://datasheet.ciiva.com/19454/232266-19454304.pdf?src-supplier=Jameco, ComponentLink1URL=https://datasheet.ciiva.com/19454/232266-19454304.pdf?src-supplier=Jameco, ComponentLink2Description=https://datasheet.ciiva.com/5150/0022232021-pcb-headers-227096-5150681.pdf?src-supplier=Mouser, ComponentLink2URL=https://datasheet.ciiva.com/5150/0022232021-pcb-headers-227096-5150681.pdf?src-supplier=Mouser, ComponentLink3Description=https://datasheet.ciiva.com/22683/1834442-22683561.pdf?src-supplier=Element14, ComponentLink3URL=https://datasheet.ciiva.com/22683/1834442-22683561.pdf?src-supplier=Element14, ComponentLink4Description=https://datasheet.ciiva.com/11746/0900766b80d8f4d1-11746058.pdf?src-supplier=RSComponents, ComponentLink4URL=https://datasheet.ciiva.com/11746/0900766b80d8f4d1-11746058.pdf?src-supplier=RSComponents, ComponentLink5Description=https://datasheet.ciiva.com/30253/114200022232021-pcb-headers-30253002.pdf?src-supplier=Onlinecomponents.com, ComponentLink5URL=https://datasheet.ciiva.com/30253/114200022232021-pcb-headers-30253002.pdf?src-supplier=Onlinecomponents.com, ComponentLink6Description=https://datasheet.ciiva.com/9468/0022232021-pcb-headers-9468476.pdf?src-supplier=Avnet, ComponentLink6URL=https://datasheet.ciiva.com/9468/0022232021-pcb-headers-9468476.pdf?src-supplier=Avnet, ComponentLink7Description=https://datasheet.ciiva.com/18453/70190606-18453638.pdf?src-supplier=Allied+Electronics, ComponentLink7URL=https://datasheet.ciiva.com/18453/70190606-18453638.pdf?src-supplier=Allied+Electronics, ComponentLink8Description=https://datasheet.ciiva.com/16658/0022232021-pcb-headers-16658167.pdf?src-supplier=Avnet+Europe, ComponentLink8URL=https://datasheet.ciiva.com/16658/0022232021-pcb-headers-16658167.pdf?src-supplier=Avnet+Europe, Contact Material=Brass, Contact Plating=Tin,Copper, Depth=6.35mm, Gender=Male, Glow Wire Compliant=Non-compliant, Halogen Free="Low Halogen", Height=10.67mm, Housing Color=White, Housing Material=Nylon, LatestRevisionDate=17-Jul-2002, LatestRevisionNote="Re-released for DXP Platform.", Lead Free="Lead Free", Length=5.08mm, Max Current Rating=4A, Mount="Through Hole", Number of Circuits=2, Number of Contacts=2, Number of Positions=2, Number of Rows=1, Orientation=Straight, Packaging=Bulk, Pitch=2.54mm, Pricing 1="1=0.17000, 10=0.16100, 100=0.11150, 500=0.09438, 1000=0.07722, 5000=0.06864, 10000=0.06221 (USD)", Publisher="Altium Limited", Radiation Hardening=No, REACH SVHC=Unknown, RoHS=Yes, Stock 1=25623, Supplier 1=Digi-Key, Termination="Through Hole", Voltage Rating (DC)=250V
P2: "Header, 3-Pin, Dual row", Color=Black, Contact Resistance=25mR, Current Rating=3A, Insulation Resistance=10GR, Manufacturer=Harwin, Manufacturer Part Number=M20-9980346, Max Operating Temperature=105°C, Min Operating Temperature=-40°C, Package Quantity=1000, Supplier Part Number 1=952-2121-ND, ComponentLink1Description=https://datasheet.ciiva.com/26899/getdatasheetpartid-483857-26899433.pdf?src-supplier=Verical, ComponentLink1URL=https://datasheet.ciiva.com/26899/getdatasheetpartid-483857-26899433.pdf?src-supplier=Verical, ComponentLink2Description=https://datasheet.ciiva.com/11745/0900766b81034e61-11745752.pdf?src-supplier=RSComponents, ComponentLink2URL=https://datasheet.ciiva.com/11745/0900766b81034e61-11745752.pdf?src-supplier=RSComponents, ComponentLink3Description=https://datasheet.ciiva.com/8046/112195-8046906.pdf?src-supplier=Element14, ComponentLink3URL=https://datasheet.ciiva.com/8046/112195-8046906.pdf?src-supplier=Element14, Connector Type="Male Pin", Contact Material=Bronze,Brass, Contact Mating Length=0.24inch, Contact Plating=Tin, Depth=5.08mm, Gender=Male, Housing Color=Black, Housing Material=Nylon, LatestRevisionDate=17-Jul-2002, LatestRevisionNote="Re-released for DXP Platform.", Length=7.62mm, Max Current Rating=3A, Mount="Through Hole", Number of Contacts=6, Number of Positions=6, Number of Rows=2, Orientation=Straight, Packaging=Bag, Pitch=2.54mm, Pricing 1="1=0.24000, 10=0.22900, 100=0.15860, 500=0.13420, 1000=0.10980, 5000=0.09760, 10000=0.08845 (USD)", Publisher="Altium Limited", Radiation Hardening=No, REACH SVHC="No SVHC", RoHS=Yes, Row Spacing=0.1inch, Stock 1=26462, Supplier 1=Digi-Key, Termination=Solder
P3: "Header, 6-Pin", Color=Black, Manufacturer=Sullins, Manufacturer Part Number=PEC06SAAN, Package Quantity=1, Supplier Part Number 1=S1012E-06-ND, ComponentLink1Description=https://s3.amazonaws.com/catalogspreads-pdf/PAGE112-113%20.100%20MALE%20HDR.pdf?src-supplier=Digi-Key, ComponentLink1URL=https://s3.amazonaws.com/catalogspreads-pdf/PAGE112-113%20.100%20MALE%20HDR.pdf?src-supplier=Digi-Key, ComponentLink2Description=http://www.sullinscorp.com/catalogs/97_Page78-79_HEADER_.100_2.54mm_MALE_BREAKAWAY.pdf?src-supplier=Future+Electronics, ComponentLink2URL=http://www.sullinscorp.com/catalogs/97_Page78-79_HEADER_.100_2.54mm_MALE_BREAKAWAY.pdf?src-supplier=Future+Electronics, Connector Type="Male Pin", Contact Material=Bronze, Contact Mating Length=0.23inch, Contact Plating=Tin, Gender=Male, Height=2.54mm, Housing Color=Black, Housing Material=Plastic, LatestRevisionDate=17-Jul-2002, LatestRevisionNote="Re-released for DXP Platform.", Lead Free="Lead Free", Length=15.2mm, Mount="Through Hole", Number of Contacts=6, Number of Positions=6, Number of Rows=1, Packaging=Bulk, Pitch=0.1inch, Pricing 1="1=0.41000, 10=0.38500, 25=0.33000, 50=0.28060, 100=0.26950, 250=0.24200, 500=0.23100 (USD)", Publisher="Altium Limited", RoHS=Yes, Stock 1=33150, Supplier 1=Digi-Key, Termination=Solder, Width=2.54mm
P4 P6: "Header, 16-Pin, Dual row", Color=Black, Manufacturer=Sullins, Manufacturer Part Number=PREC016DAAN-RC, Package Quantity=1, Supplier Part Number 1=S2012EC-16-ND, ComponentLink1Description=https://datasheet.ciiva.com/740/xrxczzzdxxn-rc-11636-b-740869.pdf?src-supplier=Digi-Key, ComponentLink1URL=https://datasheet.ciiva.com/740/xrxczzzdxxn-rc-11636-b-740869.pdf?src-supplier=Digi-Key, Connector Type="Male Pin", Contact Mating Length=0.23inch, Contact Plating=Tin, LatestRevisionDate=17-Jul-2002, LatestRevisionNote="Re-released for DXP Platform.", Mount="Through Hole", Number of Positions=32, Number of Rows=2, Packaging=Bulk, Pitch=0.1inch, Pricing 1="1=0.61000, 10=0.57200, 25=0.51440, 50=0.45740, 100=0.43830, 250=0.40016, 500=0.38112 (USD)", Publisher="Altium Limited", RoHS=Yes, Row Spacing=0.1inch, Stock 1=264, Supplier 1=Digi-Key, Termination=Solder
P5: "Header, 8-Pin, Dual row", Color=Black, Manufacturer=Sullins, Manufacturer Part Number=PREC008DAAN-RC, Package Quantity=1, Supplier Part Number 1=S2012EC-08-ND, ComponentLink1Description=https://datasheet.ciiva.com/740/xrxczzzdxxn-rc-11636-b-740877.pdf?src-supplier=Digi-Key, ComponentLink1URL=https://datasheet.ciiva.com/740/xrxczzzdxxn-rc-11636-b-740877.pdf?src-supplier=Digi-Key, Connector Type="Male Pin", Contact Mating Length=0.23inch, Contact Plating=Tin, LatestRevisionDate=17-Jul-2002, LatestRevisionNote="Re-released for DXP Platform.", Mount="Through Hole", Number of Positions=16, Number of Rows=2, Packaging=Bulk, Pitch=0.1inch, Pricing 1="1=0.35000, 10=0.33300, 25=0.28600, 50=0.24300, 100=0.23340, 250=0.20960, 500=0.20008 (USD)", Publisher="Altium Limited", RoHS=Yes, Row Spacing=0.1inch, Stock 1=1029, Supplier 1=Digi-Key, Termination=Solder
P7: "Header, 2-Pin", LatestRevisionDate=17-Jul-2002, LatestRevisionNote="Re-released for DXP Platform.", Publisher="Altium Limited"
R1: "TRIMMER 5K OHM 0.2W PC PIN TOP", Color=Blue, Manufacturer=Bourns, Max Operating Temperature=100°C, Max Power Dissipation=200mW, Min Operating Temperature=-25°C, Package Quantity=200, Resistance=5kR, Supplier Part Number 1=3306P-502-ND, Temperature Coefficient=250ppm/°C, Tolerance=25%, Voltage Rating=100V, ComponentLink1Description=https://datasheet.ciiva.com/19466/769961-19466616.pdf?src-supplier=Jameco, ComponentLink1URL=https://datasheet.ciiva.com/19466/769961-19466616.pdf?src-supplier=Jameco, ComponentLink2Description=https://datasheet.ciiva.com/11830/0900766b80dbb841-11830858.pdf?src-supplier=RSComponents, ComponentLink2URL=https://datasheet.ciiva.com/11830/0900766b80dbb841-11830858.pdf?src-supplier=RSComponents, ComponentLink3Description=https://datasheet.ciiva.com/29122/447317-da-01-en-trimmer-tht3306p-1-502-5k-0-2w-29122254.pdf?src-supplier=Conrad, ComponentLink3URL=https://datasheet.ciiva.com/29122/447317-da-01-en-trimmer-tht3306p-1-502-5k-0-2w-29122254.pdf?src-supplier=Conrad, ComponentLink4Description=https://datasheet.ciiva.com/2160/3306-2160165.pdf?src-supplier=Digi-Key, ComponentLink4URL=https://datasheet.ciiva.com/2160/3306-2160165.pdf?src-supplier=Digi-Key, ComponentLink5Description=https://datasheet.ciiva.com/20163/67-0600-20163929.pdf?src-supplier=Rapid+Electronics, ComponentLink5URL=https://datasheet.ciiva.com/20163/67-0600-20163929.pdf?src-supplier=Rapid+Electronics, ComponentLink6Description=https://datasheet.ciiva.com/16715/70154382-16715498.pdf?src-supplier=Allied+Electronics, ComponentLink6URL=https://datasheet.ciiva.com/16715/70154382-16715498.pdf?src-supplier=Allied+Electronics, ComponentLink7Description=https://datasheet.ciiva.com/15157/getdatasheetpartid-379572-15157051.pdf?src-supplier=Verical, ComponentLink7URL=https://datasheet.ciiva.com/15157/getdatasheetpartid-379572-15157051.pdf?src-supplier=Verical, ComponentLink8Description=https://datasheet.ciiva.com/1477/1815113-1477453.pdf?src-supplier=Element14, ComponentLink8URL=https://datasheet.ciiva.com/1477/1815113-1477453.pdf?src-supplier=Element14, Composition=Cermet, Contact Plating=Tin, Depth=8.1mm, Diameter=6.81mm, Height=7.62mm, Lead Free="Lead Free", Length=6.81mm, Manufacturer Part Number=3306P-1-502, Military Standard=Not, Mount="Through Hole,PCB", Number of Turns=1, Packaging=Bulk, Pitch=2.5mm, Power Rating=200mW, Pricing 1="1=0.43000, 10=0.40000, 25=0.36000, 50=0.34800, 100=0.33600, 250=0.31200, 500=0.28800, 1000=0.27000, 5000=0.20400 (USD)", Radiation Hardening=No, REACH SVHC="No SVHC", RoHS=Yes, Stock 1=2392, Supplier 1=Digi-Key, Taper=Linear, Termination=Pin, Weight=360mg, Width=6.81mm
R2 R3 R4: "Resistor", Case/Package=Conformal, Manufacturer="Stackpole Electronics", Manufacturer Part Number=CF14JT10K0, Max Operating Temperature=155°C, Max Power Dissipation=250mW, Min Operating Temperature=-55°C, Package Quantity=1, Resistance=10kR, Supplier Part Number 1=CF14JT10K0CT-ND, Temperature Coefficient=-500ppm/°C, Tolerance=5%, ComponentLink1Description=https://www.verical.com/server-webapp/html/getDatasheet?partID=367360&src-supplier=Verical, ComponentLink1URL=https://www.verical.com/server-webapp/html/getDatasheet?partID=367360&src-supplier=Verical, ComponentLink2Description=https://www.seielect.com/catalog/SEI-CF_CFM.pdf?src-supplier=Avnet, ComponentLink2URL=https://www.seielect.com/catalog/SEI-CF_CFM.pdf?src-supplier=Avnet, ComponentLink3Description=http://www.seielect.com/Catalog/SEI-CF_CFM.pdf?src-supplier=Future+Electronics, ComponentLink3URL=http://www.seielect.com/Catalog/SEI-CF_CFM.pdf?src-supplier=Future+Electronics, ComponentLink4Description=https://www.seielect.com/catalog/SEI-Packaging.pdf?src-supplier=Digi-Key, ComponentLink4URL=https://www.seielect.com/catalog/SEI-Packaging.pdf?src-supplier=Digi-Key, ComponentLink5Description=http://components.arrow.com/part/dataview/27619991S9848636N1174?src-supplier=Arrow, ComponentLink5URL=http://components.arrow.com/part/dataview/27619991S9848636N1174?src-supplier=Arrow, Composition="Carbon Film", Contact Plating=Tin,Matte, Diameter=2.3mm, Features="Flame Retardant Coating", LatestRevisionDate=29-May-2009, LatestRevisionNote="IPC-7351 Footprint Added.", Lead Free="Lead Free", Length=6.5mm, Military Standard=Not, Mount="Through Hole,Axial", Number of Terminations=2, PackageDescription="Chip Resistor", PackageReference=J1-0603, Packaging="Tape and Reel", Power Rating=250mW, Pricing 1="1=0.10000, 10=0.04000, 25=0.02880, 50=0.02200, 100=0.01620, 250=0.01236, 500=0.00990, 1000=0.00729 (USD)", Published=8-Jun-2000, Publisher="Altium Limited", Radiation Hardening=No, RoHS=Yes, Stock 1=858538, Supplier 1=Digi-Key, Termination=Axial
R5: "Resistor", Case/Package=Axial, Manufacturer=Yageo, Manufacturer Part Number=MFP-25BRD52-910R, Max Operating Temperature=155°C, Max Power Dissipation=250mW, Min Operating Temperature=-55°C, Package Quantity=1, Resistance=910R, Supplier Part Number 1=910ADCT-ND, Temperature Coefficient=25ppm/°C, Tolerance=0.1%, ComponentLink1Description=https://datasheet.ciiva.com/2713/yageolr-mfp-2013-2713082.pdf?src-supplier=Digi-Key, ComponentLink1URL=https://datasheet.ciiva.com/2713/yageolr-mfp-2013-2713082.pdf?src-supplier=Digi-Key, ComponentLink2Description=https://datasheet.ciiva.com/2713/yageolr-mfp-2013-2713083.pdf?src-supplier=Digi-Key, ComponentLink2URL=https://datasheet.ciiva.com/2713/yageolr-mfp-2013-2713083.pdf?src-supplier=Digi-Key, Composition="Metal Film", LatestRevisionDate=29-May-2009, LatestRevisionNote="IPC-7351 Footprint Added.", Lead Free="Lead Free", Length=0.248inch, Number of Terminations=2, PackageDescription="Chip Resistor", PackageReference=J1-0603, Packaging="Tape and Reel", Pricing 1="1=0.63000, 10=0.46700, 25=0.37920, 50=0.32960, 100=0.27190, 250=0.23624, 500=0.19228, 1000=0.15250 (USD)", Published=8-Jun-2000, Publisher="Altium Limited", RoHS=Yes, Stock 1=18352, Supplier 1=Digi-Key
R6 R7: "Resistor", Case/Package=Conformal, Manufacturer="Stackpole Electronics", Manufacturer Part Number=RNF14FTD1K00, Max Operating Temperature=155°C, Max Power Dissipation=250mW, Min Operating Temperature=-55°C, Package Quantity=1, Resistance=1kR, Supplier Part Number 1=RNF14FTD1K00CT-ND, Temperature Coefficient=100ppm/°C, Tolerance=1%, ComponentLink1Description=http://components.arrow.com/part/dataview/50573548S9848899N1174?src-supplier=Arrow, ComponentLink1URL=http://components.arrow.com/part/dataview/50573548S9848899N1174?src-supplier=Arrow, ComponentLink2Description=https://www.seielect.com/Catalog/SEI-RNF_RNMF.pdf?src-supplier=Avnet, ComponentLink2URL=https://www.seielect.com/Catalog/SEI-RNF_RNMF.pdf?src-supplier=Avnet, ComponentLink3Description=https://www.seielect.com/Catalog/SEI-RNF_RNMF.pdf?src-supplier=Digi-Key, ComponentLink3URL=https://www.seielect.com/Catalog/SEI-RNF_RNMF.pdf?src-supplier=Digi-Key, ComponentLink4Description=https://www.verical.com/server-webapp/html/getDatasheet?partID=360720&src-supplier=Verical, ComponentLink4URL=https://www.verical.com/server-webapp/html/getDatasheet?partID=360720&src-supplier=Verical, ComponentLink5Description=http://www.seielect.com/Catalog/SEI-RNF_RNMF.pdf?src-supplier=Future+Electronics, ComponentLink5URL=http://www.seielect.com/Catalog/SEI-RNF_RNMF.pdf?src-supplier=Future+Electronics, Composition="Metal Film", Contact Plating=Copper,Tin, Diameter=2.35mm, Features="Flame Retardant Coating", LatestRevisionDate=29-May-2009, LatestRevisionNote="IPC-7351 Footprint Added.", Lead Free="Lead Free", Length=6.35mm, Military Standard=Not, Mount="Through Hole,Axial", Number of Terminations=2, PackageDescription="Chip Resistor", PackageReference=J1-0603, Packaging="Tape and Reel", Power Rating=250mW, Pricing 1="1=0.10000, 10=0.07200, 25=0.04960, 50=0.03860, 100=0.02750, 250=0.02144, 500=0.01706, 1000=0.01210 (USD)", Published=8-Jun-2000, Publisher="Altium Limited", Radiation Hardening=No, RoHS=Yes, Stock 1=259426, Supplier 1=Digi-Key, Termination=Axial
U1: library part ERM802-1
U6: library part CMP-0095-00025-2, "8-bit AVR Microcontroller, 16KB Flash, 512 Bytes EEPROM, 1KB SRAM, 28-pin PDIP, Industrial Grade (-40°C to 85°C)", Case/Package=PDIP, Frequency=20MHz, Manufacturer="Microchip / Atmel", Manufacturer Part Number=ATMEGA168A-PU, Max Operating Temperature=85°C, Max Supply Voltage=5.5V, Min Operating Temperature=-40°C, Min Supply Voltage=1.8V, Package Quantity=14, Supplier Part Number 1=ATMEGA168A-PU-ND, ComponentLink1Description="Manufacturer URL", ComponentLink1URL=http://www.atmel.com/, ComponentLink2Description="ATmega48A/48PA/88A/88PA/168A/168PA/328/328P Datasheet", ComponentLink2URL=http://www.atmel.com/dyn/resources/prod_documents/8271.pdf, ComponentLink3Description="ATmega48A/48PA/88A/88PA/168A/168PA/328/328P Summary", ComponentLink3URL=http://www.atmel.com/dyn/resources/prod_documents/8271S.pdf, ComponentLink4Description=https://datasheet.ciiva.com/1157/1691443-1157401.pdf?src-supplier=Element14, ComponentLink4URL=https://datasheet.ciiva.com/1157/1691443-1157401.pdf?src-supplier=Element14, Contact Plating=Tin,Matte, Core Architecture=AVR, Data Bus Width=8b, DatasheetVersion="revD, May-2011", Height=4.572mm, Interface=I2C,SPI,UART,USART, Lead Free="Lead Free", Length=34.8mm, Max Frequency=20MHz, Memory Size=16KB, Memory Type=FLASH, Mount="Through Hole", Number of ADC Channels=6, Number of I2C Channels=1, Number of I/Os=23, Number of Pins=28, Number of Programmable I/O=23, Number of PWM Channels=6, Number of SPI Channels=1, Number of Timers/Counters=3, Oscillator Type=Internal, PackageDescription="28-lead (0.300\"/7.62mm Wide) Plastic Dual Inline Package (PDIP)", PackageReference=28P3, PackageVersion="revB, Sep-2001", Packaging=Rail/Tube, Peripherals="Brown-out Detect/Reset,POR,PWM,WDT", Pricing 1="1=2.19000, 25=2.00840, 100=1.81280 (USD)", Radiation Hardening=No, RAM Size=1KB, REACH SVHC="No SVHC", RevisionNote="DatasheetVersion updated. URLs added.", RoHS=Yes, Stock 1=14167, Supplier 1=Digi-Key, Watchdog Timer=Yes, Width=7.49mm
U7: library part CMP-0186-00005-2, "8-Bit I/O Expander with Serial Interface, 18-Pin PDIP, Extended Temperature", Case/Package=PDIP, Frequency=1.7MHz, Manufacturer=Microchip, Max Operating Temperature=125°C, Max Supply Voltage=5.5V, Min Operating Temperature=-40°C, Min Supply Voltage=4.5V, Nominal Supply Current=1mA, Output Current=25mA, Package Quantity=25, Power Dissipation=700mW, Supplier Part Number 1=MCP23008-E/P-ND, Code_JEDEC=MS-001, ComponentLink1Description="Manufacturer URL", ComponentLink1URL=http://www.microchip.com/, ComponentLink2Description=Datasheet, ComponentLink2URL=http://ww1.microchip.com/downloads/en/DeviceDoc/21919e.pdf, ComponentLink3Description="Package Specification", ComponentLink3URL=http://www.microchip.com/stellent/groups/techpub_sg/documents/packagingspec/en012702.pdf, ComponentLink4Description=https://datasheet.ciiva.com/19457/2161094-19457129.pdf?src-supplier=Jameco, ComponentLink4URL=https://datasheet.ciiva.com/19457/2161094-19457129.pdf?src-supplier=Jameco, ComponentLink5Description=https://datasheet.ciiva.com/4826/21919b-65915-4826338.pdf?src-supplier=Mouser, ComponentLink5URL=https://datasheet.ciiva.com/4826/21919b-65915-4826338.pdf?src-supplier=Mouser, ComponentLink6Description=https://datasheet.ciiva.com/1780/21919e-1780549.pdf?src-supplier=Digi-Key, ComponentLink6URL=https://datasheet.ciiva.com/1780/21919e-1780549.pdf?src-supplier=Digi-Key, ComponentLink7Description=https://datasheet.ciiva.com/14621/70046134-14621757.pdf?src-supplier=Allied+Electronics, ComponentLink7URL=https://datasheet.ciiva.com/14621/70046134-14621757.pdf?src-supplier=Allied+Electronics, ComponentLink8Description=https://datasheet.ciiva.com/3149/21919e-3149151.pdf?src-supplier=Avnet, ComponentLink8URL=https://datasheet.ciiva.com/3149/21919e-3149151.pdf?src-supplier=Avnet, ComponentLink9Description=https://datasheet.ciiva.com/1495/12174-1495862.pdf?src-supplier=Element14, ComponentLink9URL=https://datasheet.ciiva.com/1495/12174-1495862.pdf?src-supplier=Element14, DatasheetVersion="revE, Aug-2007", Interface=I2C,Serial, Lead Free="Lead Free", Manufacturer Part Number=MCP23008-E/P, Max Frequency=1.7MHz, Mount="Through Hole", Number of Bits=8, Number of Channels=1, Number of I/Os=8, Number of Pins=18, PackageDescription="18-Lead Plastic Dual In-Line (P) - 300 mil Body [PDIP]", PackageReference=PDIP300-P18, PackageVersion="revBB, Aug-2009", Packaging=Rail/Tube, Pricing 1="1=1.05000, 25=0.87560, 100=0.80340 (USD)", REACH SVHC="No SVHC", RevisionNote="URLs added.", RoHS=Yes, Stock 1=809, Supplier 1=Digi-Key